# Altium PCB TestProject PCB V2.PcbDoc (part 1 of 2)
Units mil, origin at the board's own origin, x right, y up, seen from the top; angles counter-clockwise.
Board outline 2300 x 2780 mil, 2 copper layers (Top Layer, Bottom Layer), stack 61.811 mil thick; 69 components, 57 nets, 259 pads, 819 vias.
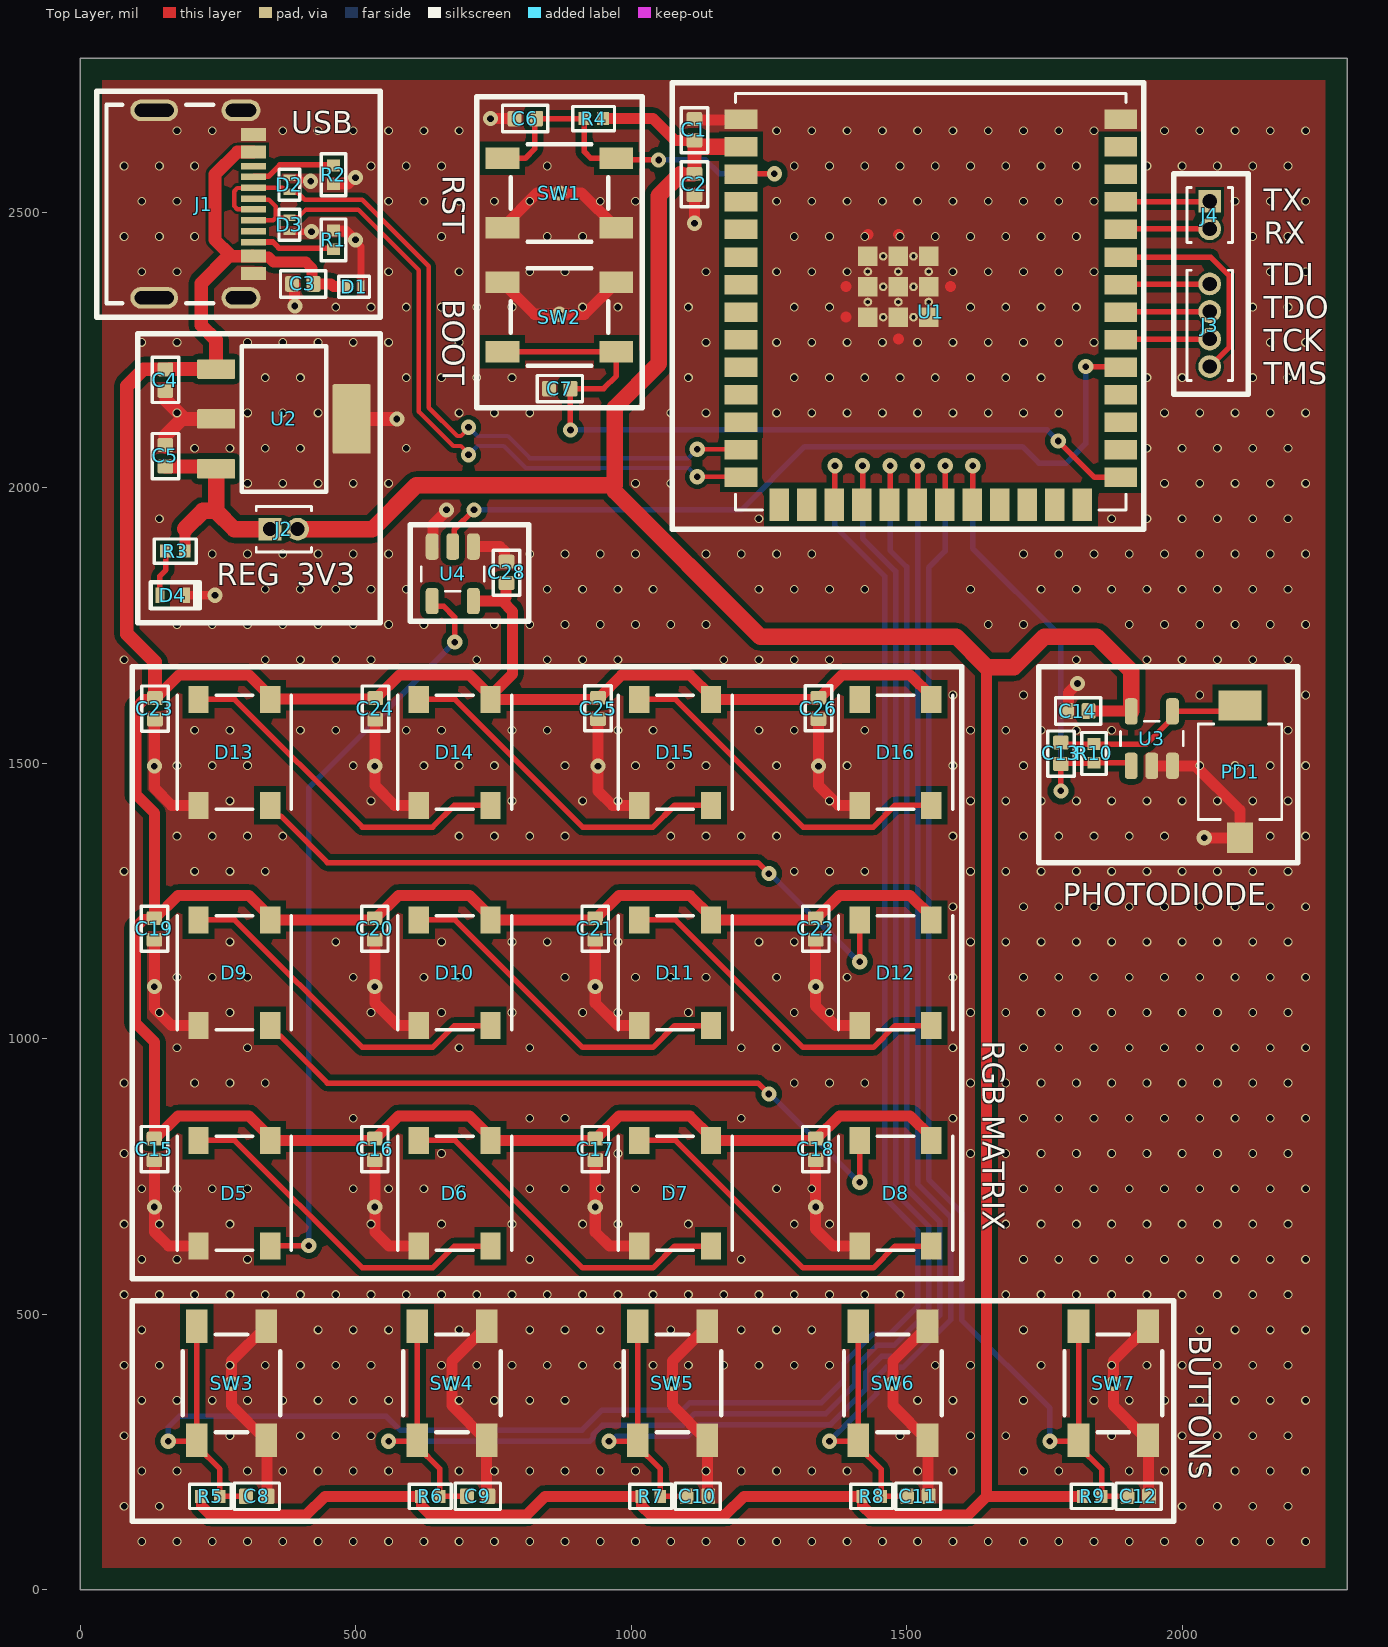
[diagram p0: Top Layer view]
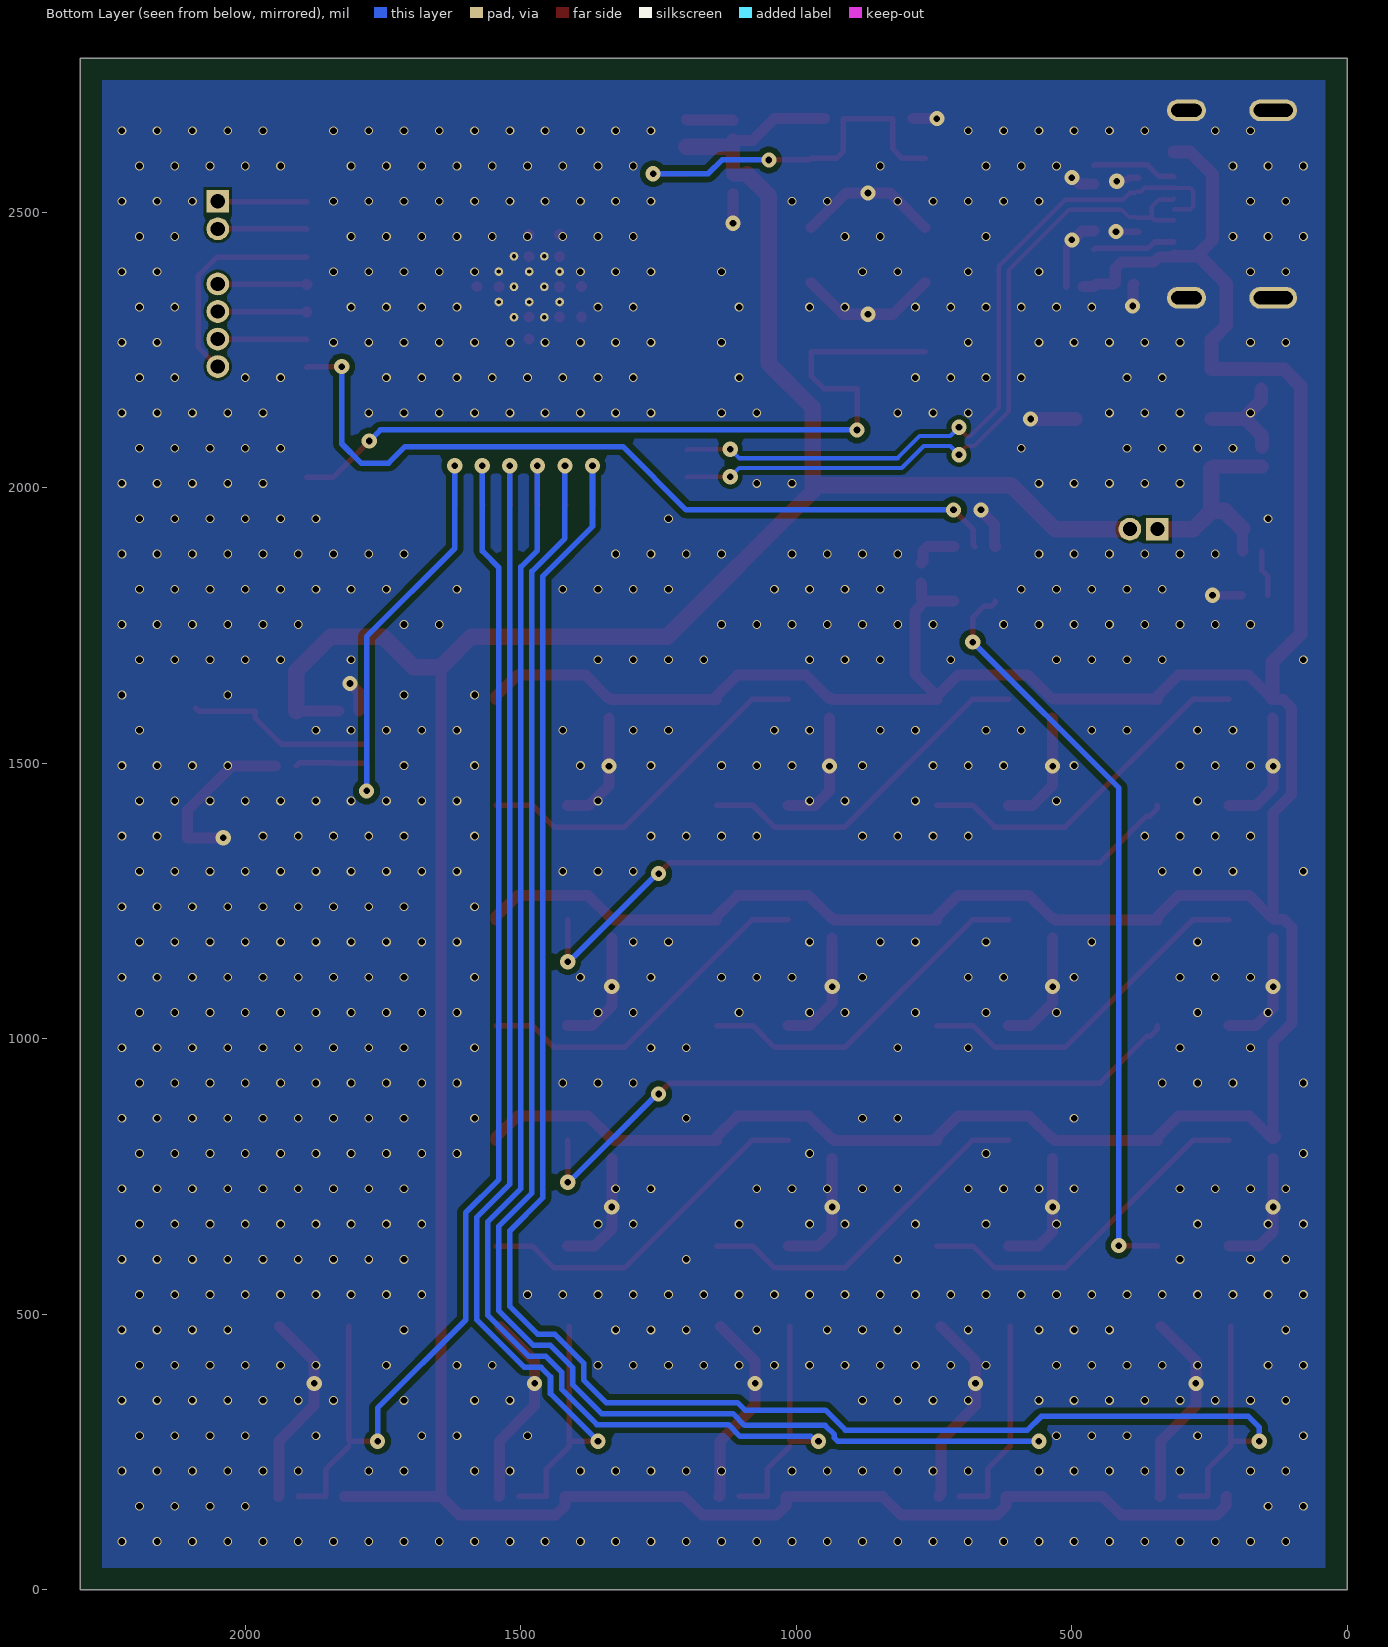
[diagram p1: Bottom Layer view, seen from below]

## Layer stack, top to bottom
Top Solder: solder mask 0.394, Solder Resist, Dk 3.5
Top Layer: signal copper 1.378
Dielectric 1: dielectric 59.055, FR-4, Dk 4.8
Bottom Layer: signal copper 1.378
Bottom Solder: solder mask 0.394, Solder Resist, Dk 3.5

## Board outline
0,0 0,2780 2300,2780 2300,0

## Design rules (kind name [scope] priority, off if disabled: settings)
Clearance SMALLER [WithinRoom('USB') or WithinRoom('REG_TO_3V3') or WithinRoom('UART')] p1: gap=5 ignorepadtopadclearanceinfootprint=FALSE
Clearance "DIFF90 Clearance" [InDifferentialPairClass('DIFF90')] p2: gap=8 ignorepadtopadclearanceinfootprint=FALSE
Clearance [All] p3: gap=10 ignorepadtopadclearanceinfootprint=FALSE
DiffPairsRouting DIFF90 [All] p1: maxlimit=10 minlimit=10 mostfreqgap=10 toplayer_minwidth=8 toplayer_maxwidth=8 toplayer_prefwidth=8 bottomlayer_minwidth=8 bottomlayer_maxwidth=8 bottomlayer_prefwidth=8 maxuncoupledlength=500
MinimumSolderMaskSliver [All] p1: minsoldermaskwidth=4
PolygonConnect [All] p1: connectstyle=Direct reliefconductorwidth=10 reliefentries=4 polygonreliefangle="90 Angle" airgapwidth=10
RoomDefinition REG_TO_3V3 [False vs False] p1: confinementstyle=ConfineIn formatcopy=TRUE lockcomponents=FALSE outline 320,1955 420,1955 420,1895 320,1895
RoomDefinition UART [False vs False] p2: confinementstyle=ConfineIn formatcopy=TRUE lockcomponents=FALSE outline 1980,2575 2125,2575 2125,2165 1980,2165
RoomDefinition USB [False vs False] p3: confinementstyle=ConfineIn formatcopy=TRUE lockcomponents=FALSE outline 365,2375 230,2375 230,2655 365,2655
RoutingVias [All] p1: holewidth=8 width=12 viastyle="Through Hole" minholewidth=8 minwidth=12 maxholewidth=8 maxwidth=12
SilkToSolderMaskClearance [IsPad] p1: minsilkscreentomaskgap=4 clearancetoexposedcopper=TRUE
SolderMaskExpansion [All] p1: expansion=4 istentingtop=FALSE
SupplyNets "Schematic Supply Nets_3" [InNet('+5V')] p1: voltage=0.000
SupplyNets "Schematic Supply Nets_2" [InNet('GND')] p2: voltage=0.000
SupplyNets "Schematic Supply Nets_1" [InNet('+3V3_REG')] p3: voltage=0.000
SupplyNets "Schematic Supply Nets" [InNet('+3V3')] p4: voltage=0.000
Width [All] p1: maxlimit=100 minlimit=10 preferedwidth=10 minimp=50.000000 maximp=50.000000 favimp=50.000000
27 further rules are at their usual default settings.

## Classes and differential pairs
differential pair class DIFF90: USB
differential pair USB: +USB_P -USB_N

## Components (designator, comment, footprint, x,y, rotation, side; value= is the part's Value field where it differs from the comment)
C1 "10uF, 10V" CAPC1005X70N 1115,2649 r270 top value=10uF
C2 "100nF, 50V" CAPC1005X70N 1115,2551 r90 top value=100nF
C3 "100nF, 50V" CAPC1005X70N 405,2370 r0 top value=100nF
C4 "4.7uF, 16V" CAPC1005X70N 155,2196 r90 top value=4.7uF
C5 "10uF, 10V" CAPC1005X70N 155,2057.68 r270 top value=10uF
C6 "1uF, 35V" CAPC1005X70N 807.68,2670 r180 top value=1uF
C7 "100nF, 50V" CAPC1005X70N 871,2180 r0 top value=100nF
C8 "1uF, 35V" CAPC1005X70N 321,170 r0 top value=1uF
C9 "1uF, 35V" CAPC1005X70N 721.98,170 r0 top value=1uF
C10 "1uF, 35V" CAPC1005X70N 1121,170 r0 top value=1uF
C11 "1uF, 35V" CAPC1005X70N 1521,170 r0 top value=1uF
C12 "1uF, 35V" CAPC1005X70N 1921,170 r0 top value=1uF
C13 "4.7nF, 50V" CAPC1005X70N 1780,1517.68 r270 top value=4.7nF
C14 "100nF, 50V" CAPC1005X70N 1811,1595 r0 top value=100nF
C15 "100nF, 50V" CAPC1005X70N 135,800 r90 top value=100nF
C16 "100nF, 50V" CAPC1005X70N 535,800 r90 top value=100nF
C17 "100nF, 50V" CAPC1005X70N 935,800 r90 top value=100nF
C18 "100nF, 50V" CAPC1005X70N 1335,800 r90 top value=100nF
C19 "100nF, 50V" CAPC1005X70N 135,1200 r90 top value=100nF
C20 "100nF, 50V" CAPC1005X70N 535,1200 r90 top value=100nF
C21 "100nF, 50V" CAPC1005X70N 935,1200 r90 top value=100nF
C22 "100nF, 50V" CAPC1005X70N 1335,1200 r90 top value=100nF
C23 "100nF, 50V" CAPC1005X70N 136,1599.5 r90 top value=100nF
C24 "100nF, 50V" CAPC1005X70N 536,1599.5 r90 top value=100nF
C25 "100nF, 50V" CAPC1005X70N 940,1600 r90 top value=100nF
C26 "100nF, 50V" CAPC1005X70N 1340,1600 r90 top value=100nF
C28 "100nF, 50V" CAPC1005X70N 774,1846 r270 top value=100nF
D1 "AQ3045-01ETG" RTVS_SOD882_LTF 497.5,2365 r180 top
D2 "AQ3045-01ETG" RTVS_SOD882_LTF 380,2550 r270 top
D3 "AQ3045-01ETG" RTVS_SOD882_LTF 380,2477.5 r90 top
D4 "VLMS1300-GS08" LED_VISHAY_VLMX1300_VIS 168.5,1805 r0 top
D5 "WS2812B" COM-16347_SPK 280,720 r270 top
D6 "WS2812B" COM-16347_SPK 680,720 r270 top
D7 "WS2812B" COM-16347_SPK 1080,720 r270 top
D8 "WS2812B" COM-16347_SPK 1480,720 r270 top
D9 "WS2812B" COM-16347_SPK 280,1120 r270 top
D10 "WS2812B" COM-16347_SPK 680,1120 r270 top
D11 "WS2812B" COM-16347_SPK 1080,1120 r270 top
D12 "WS2812B" COM-16347_SPK 1480,1120 r270 top
D13 "WS2812B" COM-16347_SPK 280,1520 r270 top
D14 "WS2812B" COM-16347_SPK 680,1520 r270 top
D15 "WS2812B" COM-16347_SPK 1080,1520 r270 top
D16 "WS2812B" COM-16347_SPK 1480,1520 r270 top
J1 "217179-0001" FP-2171790001-MFG 180,2515 r270 top
J2 "M50-3530242" HARWIN_M50-3530242 370,1925 r0 top
J3 "GRPB041VWVN-RC" GRPB041VWVN-RC 2050,2295 r270 top
J4 "M50-3530242" HARWIN_M50-3530242 2050,2495 r270 top
PD1 "BPW34S-Z" DIO_BPW_34_S-Z 2105,1485 r90 top
R1 "5k1" RESC1005X37N 460,2450 r270 top value=5.1kR
R2 "5k1" RESC1005X37N 460,2567.99 r90 top value=5.1kR
R3 "5k1" RESC1005X37N 172.99,1885 r0 top value=5.1kR
R4 "10k" RESC1005X37N 932.01,2670 r0 top value=10kR
R5 "10k" RESC1005X37N 236.67,170 r180 top value=10kR
R6 "10k" RESC1005X37N 635.69,170 r180 top value=10kR
R7 "10k" RESC1005X37N 1035.69,170 r180 top value=10kR
R8 "10k" RESC1005X37N 1436.67,170 r180 top value=10kR
R9 "10k" RESC1005X37N 1836.67,170 r180 top value=10kR
R10 "33k" RESC1005X37N 1840,1517.99 r270 top value=33kR
SW1 "PTS647SK38SMTR2LFS" FP-PTS647SK38SMTR2LFS-MFG 870,2535 r0 top
SW2 "PTS647SK38SMTR2LFS" FP-PTS647SK38SMTR2LFS-MFG 870,2310 r180 top
SW3 "PTS647SK38SMTR2LFS" FP-PTS647SK38SMTR2LFS-MFG 275,375 r90 top
SW4 "PTS647SK38SMTR2LFS" FP-PTS647SK38SMTR2LFS-MFG 675,375 r90 top
SW5 "PTS647SK38SMTR2LFS" FP-PTS647SK38SMTR2LFS-MFG 1075,375 r90 top
SW6 "PTS647SK38SMTR2LFS" FP-PTS647SK38SMTR2LFS-MFG 1475,375 r90 top
SW7 "PTS647SK38SMTR2LFS" FP-PTS647SK38SMTR2LFS-MFG 1875,375 r90 top
U1 "ESP32-S3-WROOM-1U-N8R8" XCVR_ESP32-S3-WROOM-1U 1543.94,2337.72 r0 top
U2 "TL1963A-33DCYR" DCY0004A_N 370,2125 r0 top
U3 "AD8515" SOT95P280X145-5N 1945,1545 r90 top
U4 "SN74LV1T125DBVR" SOT95P280X145-5N 676.4,1843.91 r270 top

## Footprints (in the part's own frame and the unit in brackets; to place one, negate y for a bottom-side part, rotate by r counter-clockwise, add the part's x,y. Pads: shape width x height; smd on the part's side, far side on the other; paste and mask are expansions set on the pad)
CAPC1005X70N [mm]
  rrect25% 0.64x0.72 smd: 1(-0.508,0) 2(0.483,0)
  silkscreen extent -1.04,-0.61 1.04,0.61, body extent -0.5,-0.25 0.5,0.25, height 0.55
COM-16347_SPK [mil]
  rect 49x37 smd paste+0 mask+0: 1(-96,64.96) 2(-96,-64.96) 3(96,-64.96) 4(96,64.96)
  silkscreen extent -104,-104 104,104, body extent -106,-99 106,99, height 63
DCY0004A_N [mm] "SOT223, 4-Leads, Body 6.7x3.7mm, Pitch 2.3mm, IPC Medium Density"
  rrect11% 1.75x0.9 smd: 1(-3.125,2.3) 2(-3.125,0) 3(-3.125,-2.3)
  rrect6% 1.75x3.2 smd: 4(3.125,0)
  silkscreen extent -1.95,-3.35 1.95,3.35, body extent -3.5,-3.25 3.5,3.25, height 1.62
DIO_BPW_34_S-Z [mm]
  rect 1.4x1.2 smd paste-0.05 mask+0.05: 1(-3.05,0)
  rect 1.4x2 smd paste-0.05 mask+0.05: 2(3.05,0)
  silkscreen extent -2.2,-1.92 2.2,1.92, body extent -3.22,-1.92 3.22,1.92, height 1.3
FP-2171790001-MFG [mm]
  rect 0.6x1.15 smd paste+0 mask+0: A1B12(-3.2,3.425) A4B9(-2.4,3.425) B1A12(3.2,3.425) B4A9(2.4,3.425)
  rect 0.3x1.15 smd paste+0 mask+0: A5(-1.25,3.425) A6(-0.25,3.425) A7(0.25,3.425) A8(1.25,3.425) B5(1.75,3.425) B6(0.75,3.425) B7(-0.75,3.425) B8(-1.75,3.425)
  rrect100% 1x1.8 hole 1.4 slot 0.6 at 0 deg paste-2539.97 mask+0: S1(-4.32,2.85) S2(4.32,2.85)
  rrect100% 1x2.2 hole 1.8 slot 0.6 at 0 deg paste-2539.97 mask+0: S3(-4.32,-1.15) S4(4.32,-1.15)
  silkscreen extent -4.57,-3.35 4.57,1.58, body extent -4.92,-3.45 4.92,4.1, height 0.25
FP-PTS647SK38SMTR2LFS-MFG [mm]
  rect 1.55x1 smd paste+0 mask+0: 1(-2.625,1.6) 2(2.625,1.6) 3(-2.625,-1.6) 4(2.625,-1.6)
  silkscreen extent -2.25,-2.25 2.25,2.25, body extent -3.5,-2.35 3.5,2.35, height 0.25
GRPB041VWVN-RC [mm]
  round 1.05 hole 0.65 mask+0.051: 1(-1.905,0) 2(-0.635,0) 3(0.635,0) 4(1.905,0)
  silkscreen extent -2.54,-1.05 2.54,1.05, body extent -2.54,-1.06 2.54,1.04, height 4
HARWIN_M50-3530242 [mm]
  rect 1.05x1.05 / inner round 1.05 / far side rect 1.05x1.05 hole 0.65 mask+0.051: 1(-0.635,0)
  round 1.05 hole 0.65 mask+0.051: 2(0.635,0)
  silkscreen extent -1.27,-1.05 1.27,1.05, body extent -1.32,-0.99 1.22,1.11, height 4
LED_VISHAY_VLMX1300_VIS [mil]
  rect 16x28 smd paste+0 mask+0: 1(-23.5,0) 2(23.5,0)
  silkscreen extent -40,-24 49,24, body extent -31,-16 31,16, height 32
RESC1005X37N [mm]
  rect 0.54x0.6 smd: 1(-0.432,0) 2(0.432,0)
  silkscreen extent -0.97,-0.56 0.97,0.56, body extent -0.5,-0.25 0.5,0.25, height 0.37
RTVS_SOD882_LTF [mil]
  rect 12x22 smd paste+0 mask+0: 1(-12.5,0) 2(12.5,0)
  silkscreen extent -28,-19 28,19, body extent -21,-13 21,13, height 22
SOT95P280X145-5N [mm]
  rrect50% 1.21x0.59 smd: 1(-1.255,0.95) 2(-1.255,0) 3(-1.255,-0.95) 4(1.255,-0.95) 5(1.255,0.95)
  silkscreen extent -0.33,-1.45 0.8,1.45, body extent -1.4,-1.45 1.4,1.45, height 1.45
XCVR_ESP32-S3-WROOM-1U [mm]
  rect 1.5x0.9 smd: 1(-8.75,8.41) 2(-8.75,7.14) 3(-8.75,5.87) 4(-8.75,4.6) 5(-8.75,3.33) 6(-8.75,2.06) 7(-8.75,0.79) 8(-8.75,-0.48) 9(-8.75,-1.75) 10(-8.75,-3.02) 11(-8.75,-4.29) 12(-8.75,-5.56) 13(-8.75,-6.83) 14(-8.75,-8.1) 27(8.75,-8.1) 28(8.75,-6.83) 29(8.75,-5.56) 30(8.75,-4.29) 31(8.75,-3.02) 32(8.75,-1.75) 33(8.75,-0.48) 34(8.75,0.79) 35(8.75,2.06) 36(8.75,3.33) 37(8.75,4.6) 38(8.75,5.87) 39(8.75,7.14) 40(8.75,8.41)
  rect 0.9x1.5 smd: 15(-6.985,-9.35) 16(-5.715,-9.35) 17(-4.445,-9.35) 18(-3.175,-9.35) 19(-1.905,-9.35) 20(-0.635,-9.35) 21(0.635,-9.35) 22(1.905,-9.35) 23(3.175,-9.35) 24(4.445,-9.35) 25(5.715,-9.35) 26(6.985,-9.35)
  rect 0.9x0.9 smd: 41(-2.9,2.09) 42(-1.5,2.09) 43(-0.1,2.09) 44(-2.9,0.69) 45(-1.5,0.69) 46(-0.1,0.69) 47(-2.9,-0.71) 48(-1.5,-0.71) 49(-0.1,-0.71)
  round 0.4 hole 0.2 mask+0: 41_10(-2.2,2.09) 41_11(-0.8,2.09) 41_12(-2.9,1.39) 41_13(-1.5,1.39) 41_14(-0.1,1.39) 41_15(-2.2,0.69) 41_16(-0.8,0.69) 41_17(-2.9,-0.01) 41_18(-1.5,-0.01) 41_19(-0.1,-0.01) 41_20(-2.2,-0.71) 41_21(-0.8,-0.71)
  silkscreen extent -9,-9.6 9,9.6, body extent -9,-9.6 9,9.6, height 3.35

## Part data
C1 C5: library part CL05A106MP5NRNC, "CAP CER 10UF 10V X5R 0402", Capacitor Type=Ceramic, Case/Package=0402, LCSC Part Number=C3035383, Manufacturer=Samsung, Max Operating Temperature=85°C, Min Operating Temperature=-55°C, Package Shape=Rectangular, Rated DC Voltage (URdc)=10V, Supplier Part Number=1276-CL05A106MP5NRNCCT-ND, Temperature Characteristics Code=X5R, Tolerance  (fill in as +-)=20%, Category="Ceramic Capacitors", ComponentLink1Description=https://datasheet.ciiva.com:443/pdfs/VipMasterIC/IC/SEMS/SEMS-S-A0008520814/SEMS-S-A0008520734-1.pdf?src-supplier=IHS+Markit, ComponentLink1URL=https://datasheet.ciiva.com:443/pdfs/VipMasterIC/IC/SEMS/SEMS-S-A0008520814/SEMS-S-A0008520734-1.pdf?src-supplier=IHS+Markit, Dielectric Material=Ceramic, JESD-609 Code=e3, Manufacturer Part Number=CL05A106MP5NRNC, Mounting Technology="Surface Mount", Multilayer=Yes, Packaging="Tape and Reel", Pins=2, Pricing="1=0,24, 10=0,141, 100=0,0894, 1000=0,06284, 2500=0,05624, 5000=0,05227 (USD)", Reach SVHC Compliant=Yes, RoHS=Yes, RoHS Compliant=Yes, Stock=49767, Supplier=Digikey, Terminal Finish=Nickel, Termination=Wraparound, Tolerance (fill in as +-)=20%
C2 C3 C7 C14 C15 C16 C17 C18 C19 C20 C21 C22 C23 C24 C25 C26 C28: library part CL05B104KB5NNNC, "CAP CER 0.1UF 50V X7R 0402", Capacitor Type=Ceramic, Case/Package=0402, LCSC Part Number=C960916, Manufacturer=Samsung, Max Operating Temperature=125°C, Min Operating Temperature=-55°C, Package Shape=Rectangular, Rated DC Voltage (URdc)=50V, Supplier Part Number=1276-CL05B104KB5NNNCCT-ND, Temperature Characteristics Code=X7R, Tolerance  (fill in as +-)=10%, Category="Ceramic Capacitors", ComponentLink1Description=https://datasheet.ciiva.com:443/pdfs/VipMasterIC/IC/SEMS/SEMS-S-A0008523115/SEMS-S-A0008523176-1.pdf?src-supplier=IHS+Markit, ComponentLink1URL=https://datasheet.ciiva.com:443/pdfs/VipMasterIC/IC/SEMS/SEMS-S-A0008523115/SEMS-S-A0008523176-1.pdf?src-supplier=IHS+Markit, ComponentLink2Description=https://datasheet.octopart.com/CL05B104KB5NNNC-Samsung-datasheet-97040617.pdf?src-supplier=Future+Electronics, ComponentLink2URL=https://datasheet.octopart.com/CL05B104KB5NNNC-Samsung-datasheet-97040617.pdf?src-supplier=Future+Electronics, ComponentLink3Description=https://datasheet.octopart.com/CL05B104KB5NNNC-Samsung-datasheet-8326407.pdf?src-supplier=TME, ComponentLink3URL=https://datasheet.octopart.com/CL05B104KB5NNNC-Samsung-datasheet-8326407.pdf?src-supplier=TME, Dielectric Material=Ceramic, JESD-609 Code=e3, Manufacturer Part Number=CL05B104KB5NNNC, Mounting Technology="Surface Mount", Multilayer=Yes, Packaging="Tape and Reel", Pins=2, Pricing="1=0,08, 10=0,018, 100=0,012, 1000=0,008, 2500=0,00768 (USD)", Reach SVHC Compliant=Yes, RoHS=Yes, RoHS Compliant=Yes, Stock=302298, Supplier=Digikey, Terminal Finish=Nickel, Termination=Wraparound, Tolerance (fill in as +-)=10%
C4: library part CL05A475MO5NUNC, "CAP CER 4.7UF 16V X5R 0402", Capacitor Type=Ceramic, Case/Package=0402, LCSC Part Number=C318563, Manufacturer=Samsung, Max Operating Temperature=85°C, Min Operating Temperature=-55°C, Package Shape=Rectangular, Package Style=SMTMeter, Rated DC Voltage (URdc)=16V, Supplier Part Number=1276-6836-1-ND, Temperature Characteristics Code=X5R, Tolerance  (fill in as +-)=20%, Category="Ceramic Capacitors", ComponentLink1Description=https://datasheet.ciiva.com:443/pdfs/VipMasterIC/IC/SEMS/SEMS-S-A0008384515/SEMS-S-A0008898881-1.pdf?src-supplier=IHS+Markit, ComponentLink1URL=https://datasheet.ciiva.com:443/pdfs/VipMasterIC/IC/SEMS/SEMS-S-A0008384515/SEMS-S-A0008898881-1.pdf?src-supplier=IHS+Markit, ComponentLink2Description=http://www.farnell.com/datasheets/2710653.pdf?src-supplier=Farnell, ComponentLink2URL=http://www.farnell.com/datasheets/2710653.pdf?src-supplier=Farnell, ComponentLink3Description=http://www.samsungsem.com/kr/support/product-search/mlcc/CL05A475MO5NUNC.jsp?src-supplier=Digikey, ComponentLink3URL=http://www.samsungsem.com/kr/support/product-search/mlcc/CL05A475MO5NUNC.jsp?src-supplier=Digikey, ComponentLink4Description=http://www.farnell.com/datasheets/2710653.pdf?src-supplier=Newark, ComponentLink4URL=http://www.farnell.com/datasheets/2710653.pdf?src-supplier=Newark, ComponentLink5Description=http://www.farnell.com/datasheets/2710653.pdf?src-supplier=Element14, ComponentLink5URL=http://www.farnell.com/datasheets/2710653.pdf?src-supplier=Element14, ComponentLink6Description=https://datasheet.octopart.com/CL05A475MO5NUNC-Samsung-Electro-Mechanics-datasheet-123102911.pdf?src-supplier=Future+Electronics, ComponentLink6URL=https://datasheet.octopart.com/CL05A475MO5NUNC-Samsung-Electro-Mechanics-datasheet-123102911.pdf?src-supplier=Future+Electronics, Dielectric Material=Ceramic, Height=0.7mm, JESD-609 Code=e3, Length=1mm, Manufacturer Part Number=CL05A475MO5NUNC, Mounting Technology="Surface Mount", Multilayer=Yes, Packaging="Tape and Reel", Pins=2, Pricing="1=0,15, 10=0,091, 100=0,0851 (USD)", Reach SVHC Compliant=Yes, RoHS=Yes, RoHS Compliant=Yes, Stock=3323, Supplier=Digikey, Terminal Finish=Nickel, Termination=Wraparound, Tolerance (fill in as +-)=20%, Width=0.5mm
C6 C8 C9 C10 C11 C12: library part CL05A105KL5NRNC, "CAP CER 1UF 35V X5R 0402", Capacitor Type=Ceramic, Case/Package=0402, LCSC Part Number=C307413, Manufacturer=Samsung, Max Operating Temperature=85°C, Min Operating Temperature=-55°C, Package Shape=Rectangular, Rated DC Voltage (URdc)=35V, Supplier Part Number=1276-6796-1-ND, Temperature Characteristics Code=X5R, Tolerance  (fill in as +-)=10%, Category="Ceramic Capacitors", ComponentLink1Description=https://datasheet.ciiva.com:443/pdfs/VipMasterIC/IC/SEMS/SEMS-S-A0008384515/SEMS-S-A0008872905-1.pdf?src-supplier=IHS+Markit, ComponentLink1URL=https://datasheet.ciiva.com:443/pdfs/VipMasterIC/IC/SEMS/SEMS-S-A0008384515/SEMS-S-A0008872905-1.pdf?src-supplier=IHS+Markit, ComponentLink2Description=http://www.samsungsem.com/kr/support/product-search/mlcc/CL05A105KL5NRNC.jsp?src-supplier=Digikey, ComponentLink2URL=http://www.samsungsem.com/kr/support/product-search/mlcc/CL05A105KL5NRNC.jsp?src-supplier=Digikey, ComponentLink3Description=https://datasheet.octopart.com/CL05A105KL5NRNC-Samsung-datasheet-8326407.pdf?src-supplier=TME, ComponentLink3URL=https://datasheet.octopart.com/CL05A105KL5NRNC-Samsung-datasheet-8326407.pdf?src-supplier=TME, Dielectric Material=Ceramic, JESD-609 Code=e3, Manufacturer Part Number=CL05A105KL5NRNC, Mounting Technology="Surface Mount", Multilayer=Yes, Packaging="Tape and Reel", Pins=2, Pricing="1=0,29, 10=0,17, 100=0,1097, 1000=0,07829, 2500=0,07048, 5000=0,06578 (USD)", Reach SVHC Compliant=Yes, RoHS=Yes, RoHS Compliant=Yes, Stock=72807, Supplier=Digikey, Terminal Finish=Nickel, Termination=Wraparound, Tolerance (fill in as +-)=10%
C13: library part CL05B472KB5VPNC, "CAP CER 4700PF 50V X7R 0402", Capacitor Type=Ceramic, Case/Package=0402, LCSC Part Number=C307338, Manufacturer=Samsung, Max Operating Temperature=125°C, Min Operating Temperature=-55°C, Package Shape=Rectangular, Rated DC Voltage (URdc)=50V, Supplier Part Number=1276-6576-1-ND, Temperature Characteristics Code=X7R, Tolerance  (fill in as +-)=10%, Category="Ceramic Capacitors", ComponentLink1Description=https://datasheet.ciiva.com:443/pdfs/VipMasterIC/IC/SEMS/SEMS-S-A0007757376/SEMS-S-A0007757405-1.pdf?src-supplier=IHS+Markit, ComponentLink1URL=https://datasheet.ciiva.com:443/pdfs/VipMasterIC/IC/SEMS/SEMS-S-A0007757376/SEMS-S-A0007757405-1.pdf?src-supplier=IHS+Markit, ComponentLink2Description=http://www.samsungsem.com/kr/support/product-search/mlcc/CL05B472KB5VPNC.jsp?src-supplier=Digikey, ComponentLink2URL=http://www.samsungsem.com/kr/support/product-search/mlcc/CL05B472KB5VPNC.jsp?src-supplier=Digikey, ComponentLink3Description=http://www.samsungsem.com/kr/support/library/product-catalog/mlcc.jsp?src-supplier=Digikey, ComponentLink3URL=http://www.samsungsem.com/kr/support/library/product-catalog/mlcc.jsp?src-supplier=Digikey, ComponentLink4Description=http://www.samsungsem.com/servlet/FileDownload?type=spec&file=CL05B472KB5VPNC.pdf&src-supplier=Avnet, ComponentLink4URL=http://www.samsungsem.com/servlet/FileDownload?type=spec&file=CL05B472KB5VPNC.pdf&src-supplier=Avnet, ComponentLink5Description=https://datasheet.octopart.com/CL05B472KB5VPNC-Samsung-Electro-Mechanics-datasheet-133510618.pdf?src-supplier=Future+Electronics, ComponentLink5URL=https://datasheet.octopart.com/CL05B472KB5VPNC-Samsung-Electro-Mechanics-datasheet-133510618.pdf?src-supplier=Future+Electronics, Dielectric Material=Ceramic, JESD-609 Code=e3, Manufacturer Part Number=CL05B472KB5VPNC, Mounting Technology="Surface Mount", Multilayer=Yes, Packaging="Tape and Reel", Pins=2, Pricing="1=0,1, 10=0,031, 100=0,0179, 1000=0,01116, 2500=0,0095, 5000=0,00851 (USD)", Reach SVHC Compliant=Yes, Reference Standard=AEC-Q200, RoHS=Yes, RoHS Compliant=Yes, Stock=112941, Supplier=Digikey, Terminal Finish=Nickel, Termination=Wraparound, Tolerance (fill in as +-)=10%
D1 D2 D3: "TVS DIODE 5.3VWM 12VC SOD882", LCSC Part Number=C3710326, Manufacturer=Littelfuse, Max Breakdown Voltage=9V, Max Operating Temperature=150°C, Min Breakdown Voltage=6.8V, Min Operating Temperature=-55°C, Non-rep Peak Rev Power Dis-Max=40W, Package Body Material=Plastic, Package Shape=Rectangular, Package Style="CHIP CARRIERMeter", Rep Pk Reverse Voltage-Max=5.3V, Supplier Part Number=F9321CT-ND, Category="TVS Diodes", ComponentLink1Description=https://datasheet.ciiva.com:443/pdfs/VipMasterIC/IC/LFSI/LFSI-S-A0007892042/LFSI-S-A0007892042-1.pdf?src-supplier=IHS+Markit, ComponentLink1URL=https://datasheet.ciiva.com:443/pdfs/VipMasterIC/IC/LFSI/LFSI-S-A0007892042/LFSI-S-A0007892042-1.pdf?src-supplier=IHS+Markit, ComponentLink2Description=https://www.littelfuse.com/~/media/electronics/datasheets/tvs_diode_arrays/littelfuse_tvs_diode_array_aq3045_datasheet.pdf.pdf?src-supplier=Digikey, ComponentLink2URL=https://www.littelfuse.com/~/media/electronics/datasheets/tvs_diode_arrays/littelfuse_tvs_diode_array_aq3045_datasheet.pdf.pdf?src-supplier=Digikey, ComponentLink3Description=http://www.littelfuse.com/~/media/electronics/datasheets/tvs_diode_arrays/littelfuse_tvs_diode_array_aq3045_datasheet.pdf.pdf?src-supplier=Digikey, ComponentLink3URL=http://www.littelfuse.com/~/media/electronics/datasheets/tvs_diode_arrays/littelfuse_tvs_diode_array_aq3045_datasheet.pdf.pdf?src-supplier=Digikey, Diode Element Material=SILICON, Diode Type="TRANS VOLTAGE SUPPRESSOR", Manufacturer Part Number=AQ3045-01ETG, Number of Elements=1, Pins=2, Polarity=Bidirectional, Pricing="1=0,45, 10=0,29, 100=0,141, 500=0,134, 1000=0,131 (USD)", Reach SVHC Compliant=Yes, Reference Standard=AEC-Q101, RoHS=Yes, RoHS Compliant=Yes, Stock=7460, Supplier=Digikey, Surface Mount=Yes, Technology=AVALANCHE, Terminal Form="No Lead", Terminal Position=BOTTOM
D4: "LED RED 0603 SMD", Color=Red, Forward Current=30mA, Forward Voltage=2.4V, LCSC Part Number=C83242, Manufacturer="Vishay Semiconductors", Max Operating Temperature=85°C, Min Operating Temperature=-35°C, Reverse Voltage-Max=5V, Supplier Part Number=VLMS1300-GS08CT-ND, Additional Feature="HIGH RELIABILITY", Category=LEDs, Channels=1, Color@wavelength=Red, ComponentLink1Description=https://datasheet.ciiva.com:443/pdfs/VipMasterIC/IC/VISH/VISH-S-A0004564149/VISH-S-A0004564149-1.pdf?src-supplier=IHS+Markit, ComponentLink1URL=https://datasheet.ciiva.com:443/pdfs/VipMasterIC/IC/VISH/VISH-S-A0004564149/VISH-S-A0004564149-1.pdf?src-supplier=IHS+Markit, ComponentLink2Description=https://datasheet.ciiva.com/2114/vlmo1300-2114931.pdf?src-supplier=Digikey, ComponentLink2URL=https://datasheet.ciiva.com/2114/vlmo1300-2114931.pdf?src-supplier=Digikey, ComponentLink3Description=https://datasheet.ciiva.com/26322/vlmo1300-26322153.pdf?src-supplier=Element14, ComponentLink3URL=https://datasheet.ciiva.com/26322/vlmo1300-26322153.pdf?src-supplier=Element14, ComponentLink4Description=https://datasheet.ciiva.com/8028/vlmo1300-8028047.pdf?src-supplier=Element14, ComponentLink4URL=https://datasheet.ciiva.com/8028/vlmo1300-8028047.pdf?src-supplier=Element14, Luminous Intensity-Nom=54mcd, Manufacturer Part Number=VLMS1300-GS08, Mounting Technology="Surface Mount", Optoelectronic Device Type="SINGLE COLOR LED", Overall Height=0.8mm, Packaging="Tape and Reel", Pins=2, Pricing="1=0,21, 10=0,143, 100=0,0998, 500=0,07982, 1000=0,07322 (USD)", Reach SVHC Compliant=Yes, RoHS=Yes, RoHS Compliant=Yes, Shape=Rectangular, Size=1.1mm, Stock=56745, Supplier=Digikey, Terminal Pitch=1.5mm, Viewing Angle=130°
D5 D6 D7 D8 D9 D10 D11 D12 D13 D14 D15 D16: library part 16347, "ADDRESS LED RED/GRN/BLUE", LCSC Part Number=C7433145, Manufacturer=SparkFun, Supplier Part Number=1568-16347CT-ND, Manufacturer Part Number=16347, Pricing="1=0,68 (USD)", RoHS=No, Stock=44982, Supplier=Digikey
J1: "CONN RCP USB2.0 TYP C 24P SMD RA", LCSC Part Number=C3197684, Manufacturer=Molex, Supplier Part Number=900-2171790001CT-ND, Category=Connectors, Manufacturer Part Number=217179-0001, Pricing="1=0,83, 10=0,704, 25=0,6596, 50=0,628, 100=0,598, 250=0,56052, 500=0,53374 (USD)", RoHS=No, Stock=20923, Supplier=Digikey
J2 J4: "CONN HEADER VERT 2POS 1.27MM", Flammability Rating="UL94 V-0", LCSC Part Number=C3325334, Manufacturer=Harwin, Supplier Part Number=952-3598-ND, Category="Headers and Wire Housings", ComponentLink1Description=https://datasheet.ciiva.com:443/pdfs/VipMasterIC/IC/HRWN/HRWN-S-A0002541787/HRWN-S-A0002541787-1.pdf?src-supplier=IHS+Markit, ComponentLink1URL=https://datasheet.ciiva.com:443/pdfs/VipMasterIC/IC/HRWN/HRWN-S-A0002541787/HRWN-S-A0002541787-1.pdf?src-supplier=IHS+Markit, ComponentLink2Description=https://cdn.harwin.com/pdfs/Harwin_PC_Connectors_Archer.pdf?src-supplier=Digikey, ComponentLink2URL=https://cdn.harwin.com/pdfs/Harwin_PC_Connectors_Archer.pdf?src-supplier=Digikey, Connector Type="BOARD CONNECTOR", Contact Finish - Mating="NOT SPECIFIED", Contact Gender=Male, DIN Conformance=No, Filter Feature=No, IEC Conformance=No, Manufacturer Part Number=M50-3530242, MIL Conformance=No, Mixed Contacts=No, Mounting Style=STRAIGHT, Mounting Technology=Board, Number of Contacts=2, Number of Rows Loaded=1, Option="General Purpose", Pricing="1=0,1, 10=0,084, 100=0,0713, 500=0,06358, 1000=0,06054, 5000=0,05403, 10000=0,05145 (USD)", Reach SVHC Compliant=Yes, RoHS=Yes, RoHS Compliant=Yes, Stock=31275, Supplier=Digikey, Terminal Pitch=1.27mm, Termination=Solder
J3: "CONN HEADER VERT 4POS 1.27MM", Flammability Rating="UL94 V-0", LCSC Part Number=C7198233, Manufacturer=Sullins, Manufacturer Series=GRPB, Supplier Part Number=S9014E-04-ND, Category=Connectors, ComponentLink1Description=https://datasheet.ciiva.com:443/pdfs/VipMasterIC/IC/SUCS/SUCSS00161/SUCSS00161-1.pdf?src-supplier=IHS+Markit, ComponentLink1URL=https://datasheet.ciiva.com:443/pdfs/VipMasterIC/IC/SUCS/SUCSS00161/SUCSS00161-1.pdf?src-supplier=IHS+Markit, ComponentLink2Description=https://datasheet.ciiva.com/726/71-grpb-1vwvn-rc-10957-c-726650.pdf?src-supplier=Digikey, ComponentLink2URL=https://datasheet.ciiva.com/726/71-grpb-1vwvn-rc-10957-c-726650.pdf?src-supplier=Digikey, Connector Type="BOARD CONNECTOR", Contact Finish - Mating="GOLD FLASH", Contact Finish - Termination="GOLD FLASH", Contact Gender=Male, Contact Material=Brass, DIN Conformance=No, Filter Feature=No, IEC Conformance=No, JESD-609 Code=e4, Manufacturer Part Number=GRPB041VWVN-RC, MIL Conformance=No, Mixed Contacts=No, Mounting Style=STRAIGHT, Mounting Technology=Board, Number of Contacts=4, Number of Rows Loaded=1, Option="General Purpose", Pricing="1=0,25, 10=0,212, 100=0,1804, 500=0,16098, 1000=0,15328, 5000=0,13682, 10000=0,13029 (USD)", Reach SVHC Compliant=Yes, RoHS=Yes, RoHS Compliant=Yes, Stock=10602, Supplier=Digikey, Terminal Pitch=1.27mm, Termination=Solder
PD1: "SENSOR PHOTODIODE 850NM 2SMD GW", Dark Current-Max=30nA, LCSC Part Number=C67891, Light Current-Nom=50uA, Manufacturer="Osram Opto", Max Operating Temperature=100°C, Min Operating Temperature=-40°C, Reverse Breakdown Voltage-Min=32V, Supplier Part Number=475-BPW34S-ZCT-ND, Category=Phototransistor, Channels=1, ComponentLink1Description=https://datasheet.ciiva.com:443/pdfs/VipMasterIC/IC/OSOS/OSOS-S-A0005288917/OSOS-S-A0005288917-1.pdf?src-supplier=IHS+Markit, ComponentLink1URL=https://datasheet.ciiva.com:443/pdfs/VipMasterIC/IC/OSOS/OSOS-S-A0005288917/OSOS-S-A0005288917-1.pdf?src-supplier=IHS+Markit, ComponentLink2Description=https://datasheet.ciiva.com/2819/bpw34-spdf-2819825.pdf?src-supplier=Digikey, ComponentLink2URL=https://datasheet.ciiva.com/2819/bpw34-spdf-2819825.pdf?src-supplier=Digikey, ComponentLink3Description=https://datasheet.ciiva.com/2819/bpw34-spdf-2819826.pdf?src-supplier=Digikey, ComponentLink3URL=https://datasheet.ciiva.com/2819/bpw34-spdf-2819826.pdf?src-supplier=Digikey, ComponentLink4Description=https://datasheet.ciiva.com/2819/bpw34-spdf-2819827.pdf?src-supplier=Digikey, ComponentLink4URL=https://datasheet.ciiva.com/2819/bpw34-spdf-2819827.pdf?src-supplier=Digikey, Infrared Range=Yes, JESD-609 Code=e3, Manufacturer Part Number=BPW34S-Z, Optoelectronic Device Type="PIN PHOTODIODE", Pricing="1=1,17, 10=0,824, 100=0,6131, 500=0,51934 (USD)", Reach SVHC Compliant=Yes, RoHS=Yes, RoHS Compliant=Yes, Shape=Square, Size=2.65mm, Stock=32968, Supplier=Digikey, Terminal Finish=Tin
R1 R2 R3: library part AC0402FR-075K1L, "RES SMD 5.1K OHM 1% 1/16W 0402", Case Code (Imperial)=0402, Case Code (Metric)=1005, LCSC Part Number=C144745, Manufacturer=Yageo, Max Operating Temperature=155°C, Max Power Dissipation=63mW, Min Operating Temperature=-55°C, Supplier Part Number=YAG3503CT-ND, Temperature Coefficient=100ppm/°C, Tolerance=1%, Voltage Rating=50V, Case/Package=0402, Category="Chip SMD Resistors", ComponentLink1Description=https://datasheet.octopart.com/AC0402FR-075K1L-Yageo-datasheet-166720450.pdf?src-supplier=Future+Electronics, ComponentLink1URL=https://datasheet.octopart.com/AC0402FR-075K1L-Yageo-datasheet-166720450.pdf?src-supplier=Future+Electronics, ComponentLink2Description=http://www.yageo.com/NewPortal/yageodocoutput?fileName=/pdf/R-Chip/PYu-AC_51_RoHS_L_6.pdf&src-supplier=Digikey, ComponentLink2URL=http://www.yageo.com/NewPortal/yageodocoutput?fileName=/pdf/R-Chip/PYu-AC_51_RoHS_L_6.pdf&src-supplier=Digikey, ComponentLink3Description=http://www.yageo.com/documents/recent/PYu-AC_51_RoHS_L_2_revised.pdf?src-supplier=Future+Electronics, ComponentLink3URL=http://www.yageo.com/documents/recent/PYu-AC_51_RoHS_L_2_revised.pdf?src-supplier=Future+Electronics, ComponentLink4Description=https://datasheet.octopart.com/AC0402FR-075K1L-Yageo-datasheet-178509465.pdf?src-supplier=Newark, ComponentLink4URL=https://datasheet.octopart.com/AC0402FR-075K1L-Yageo-datasheet-178509465.pdf?src-supplier=Newark, ComponentLink5Description=https://datasheet.octopart.com/AC0402FR-075K1L-Yageo-datasheet-178509465.pdf?src-supplier=Farnell, ComponentLink5URL=https://datasheet.octopart.com/AC0402FR-075K1L-Yageo-datasheet-178509465.pdf?src-supplier=Farnell, ComponentLink6Description=https://datasheet.octopart.com/AC0402FR-075K1L-Yageo-datasheet-178509465.pdf?src-supplier=Element14, ComponentLink6URL=https://datasheet.octopart.com/AC0402FR-075K1L-Yageo-datasheet-178509465.pdf?src-supplier=Element14, Features="Moisture Resistant,Automotive AEC-Q200", Height=0.015inch, Lead Free=5697LeadFree, Length=0.039inch, Manufacturer Part Number=AC0402FR-075K1L, Mounting Technology="Surface Mount", Number of Terminations=2, Packaging="Cut Tape", Power Rating=63mW, Pricing="1=0,1, 10=0,009, 100=0,0071, 1000=0,00612, 2500=0,0051, 5000=0,00407 (USD)", RoHS=Yes, RoHS Compliant=Yes, Series=AC, Stock=60988, Supplier=Digikey, Width=0.02inch
R4 R5 R6 R7 R8 R9: library part AC0402FR-0710KL, "RES SMD 10K OHM 1% 1/16W 0402", Case/Package=0402, LCSC Part Number=C144807, Manufacturer=Yageo, Max Operating Temperature=155°C, Min Operating Temperature=-55°C, Package Height=0.32mm, Package Length=1mm, Package Shape=Rectangular, Package Width=0.5mm, Power=62.5mW, Rated Temperature=70°C, Resistor Type="FIXED RESISTOR", Supplier Part Number=YAG3436CT-ND, Temperature Coefficient (ppm/Cel)=100, Tolerance=1%, Working Voltage=50V, Additional Feature="LASER TRIMMABLE", Category="Chip SMD Resistors", ComponentLink1Description=https://datasheet.ciiva.com:443/pdfs/VipMasterIC/IC/YAGO/YAGO-S-A0003597364/YAGO-S-A0003597364-1.pdf?src-supplier=IHS+Markit, ComponentLink1URL=https://datasheet.ciiva.com:443/pdfs/VipMasterIC/IC/YAGO/YAGO-S-A0003597364/YAGO-S-A0003597364-1.pdf?src-supplier=IHS+Markit, ComponentLink2Description=https://datasheet.ciiva.com/12656/pyu-ac-51-rohs-l-2-12656634.pdf?src-supplier=Mouser, ComponentLink2URL=https://datasheet.ciiva.com/12656/pyu-ac-51-rohs-l-2-12656634.pdf?src-supplier=Mouser, Construction=Chip, JESD-609 Code=e3, Manufacturer Part Number=AC0402FR-0710KL, Mounting Technology="Surface Mount", Packaging="Tape and Reel", Pins=2, Pricing="1=0,1, 10=0,009, 100=0,0082, 1000=0,00612, 2500=0,0051, 5000=0,00407 (USD)", Reach SVHC Compliant=Yes, Reference Standard=AEC-Q200, RoHS=Yes, RoHS Compliant=Yes, Stock=624823, Supplier=Digikey, Technology="METAL GLAZE/THICK FILM", Terminal Finish=Nickel, Termination=Wraparound
R10: library part AC0402FR-0733KL, "RES SMD 33K OHM 1% 1/16W 0402", Case/Package=0402, LCSC Part Number=C138291, Manufacturer=Yageo, Max Operating Temperature=155°C, Min Operating Temperature=-55°C, Package Height=0.32mm, Package Length=1mm, Package Shape=Rectangular, Package Width=0.5mm, Power=62.5mW, Rated Temperature=70°C, Resistor Type="FIXED RESISTOR", Supplier Part Number=YAG3477CT-ND, Temperature Coefficient (ppm/Cel)=100, Tolerance=1%, Working Voltage=50V, Additional Feature="LASER TRIMMABLE", Category="Chip SMD Resistors", ComponentLink1Description=https://datasheet.ciiva.com:443/pdfs/VipMasterIC/IC/YAGO/YAGO-S-A0003597364/YAGO-S-A0003597364-1.pdf?src-supplier=IHS+Markit, ComponentLink1URL=https://datasheet.ciiva.com:443/pdfs/VipMasterIC/IC/YAGO/YAGO-S-A0003597364/YAGO-S-A0003597364-1.pdf?src-supplier=IHS+Markit, ComponentLink2Description=https://datasheet.octopart.com/AC0402FR-0733KL-Yageo-datasheet-178509465.pdf?src-supplier=Farnell, ComponentLink2URL=https://datasheet.octopart.com/AC0402FR-0733KL-Yageo-datasheet-178509465.pdf?src-supplier=Farnell, ComponentLink3Description=http://www.yageo.com/NewPortal/yageodocoutput?fileName=/pdf/R-Chip/PYu-AC_51_RoHS_L_6.pdf&src-supplier=Digikey, ComponentLink3URL=http://www.yageo.com/NewPortal/yageodocoutput?fileName=/pdf/R-Chip/PYu-AC_51_RoHS_L_6.pdf&src-supplier=Digikey, ComponentLink4Description=https://www.yageo.com/upload/media/product/productsearch/datasheet/rchip/PYu-AC_51_RoHS_L_7.pdf?src-supplier=Digikey, ComponentLink4URL=https://www.yageo.com/upload/media/product/productsearch/datasheet/rchip/PYu-AC_51_RoHS_L_7.pdf?src-supplier=Digikey, ComponentLink5Description=https://datasheet.octopart.com/AC0402FR-0733KL-Yageo-datasheet-178509465.pdf?src-supplier=Element14, ComponentLink5URL=https://datasheet.octopart.com/AC0402FR-0733KL-Yageo-datasheet-178509465.pdf?src-supplier=Element14, ComponentLink6Description=https://datasheet.octopart.com/AC0402FR-0733KL-Yageo-datasheet-178509465.pdf?src-supplier=Newark, ComponentLink6URL=https://datasheet.octopart.com/AC0402FR-0733KL-Yageo-datasheet-178509465.pdf?src-supplier=Newark, ComponentLink7Description=https://datasheet.octopart.com/AC0402FR-0733KL-Yageo-datasheet-166720450.pdf?src-supplier=Future+Electronics, ComponentLink7URL=https://datasheet.octopart.com/AC0402FR-0733KL-Yageo-datasheet-166720450.pdf?src-supplier=Future+Electronics, ComponentLink8Description=http://www.yageo.com/documents/recent/PYu-AC_51_RoHS_L_2_revised.pdf?src-supplier=Future+Electronics, ComponentLink8URL=http://www.yageo.com/documents/recent/PYu-AC_51_RoHS_L_2_revised.pdf?src-supplier=Future+Electronics, ComponentLink9Description=https://datasheet.octopart.com/AC0402FR-0733KL-Yageo-datasheet-140571090.pdf?src-supplier=Arrow.cn, ComponentLink9URL=https://datasheet.octopart.com/AC0402FR-0733KL-Yageo-datasheet-140571090.pdf?src-supplier=Arrow.cn, Construction=Chip, JESD-609 Code=e3, Manufacturer Part Number=AC0402FR-0733KL, Mounting Technology="Surface Mount", Packaging="Tape and Reel", Pins=2, Pricing="1=0,1, 10=0,011, 100=0,0082, 1000=0,00612, 2500=0,0051, 5000=0,00407 (USD)", Reach SVHC Compliant=Yes, Reference Standard=AEC-Q200, RoHS=Yes, RoHS Compliant=Yes, Stock=108993, Supplier=Digikey, Technology="METAL GLAZE/THICK FILM", Terminal Finish=Nickel, Termination=Wraparound
SW1 SW2 SW3 SW4 SW5 SW6 SW7: "SWITCH TACTILE SPST-NO 0.05A 12V", LCSC Part Number=C2798978, Manufacturer="ITT C&K", Supplier Part Number=PTS647SK38SMTR2LFSCT-ND, Category="Tactile Switches", ComponentLink1Description=http://datasheet.octopart.com/PTS647SK38SMTR2LFS-C%26K-Components-datasheet-117317067.pdf?src-supplier=Digikey, ComponentLink1URL=http://datasheet.octopart.com/PTS647SK38SMTR2LFS-C%26K-Components-datasheet-117317067.pdf?src-supplier=Digikey, ComponentLink2Description=https://www.ckswitches.com/media/2567/pts647.pdf?src-supplier=Digikey, ComponentLink2URL=https://www.ckswitches.com/media/2567/pts647.pdf?src-supplier=Digikey, ComponentLink3Description=http://datasheet.octopart.com/PTS647SK38SMTR2LFS-C%26K-Components-datasheet-117317067.pdf?src-supplier=Avnet, ComponentLink3URL=http://datasheet.octopart.com/PTS647SK38SMTR2LFS-C%26K-Components-datasheet-117317067.pdf?src-supplier=Avnet, ComponentLink4Description=http://datasheet.octopart.com/PTS647SK38SMTR2LFS-C%26K-Components-datasheet-117317067.pdf?src-supplier=Arrow+Electronics, ComponentLink4URL=http://datasheet.octopart.com/PTS647SK38SMTR2LFS-C%26K-Components-datasheet-117317067.pdf?src-supplier=Arrow+Electronics, ComponentLink5Description=http://datasheet.octopart.com/PTS647SK38SMTR2LFS-C%26K-Components-datasheet-117317067.pdf?src-supplier=Verical, ComponentLink5URL=http://datasheet.octopart.com/PTS647SK38SMTR2LFS-C%26K-Components-datasheet-117317067.pdf?src-supplier=Verical, ComponentLink6Description=http://datasheet.octopart.com/PTS647SK38SMTR2LFS-C%26K-Components-datasheet-117317067.pdf?src-supplier=Newark, ComponentLink6URL=http://datasheet.octopart.com/PTS647SK38SMTR2LFS-C%26K-Components-datasheet-117317067.pdf?src-supplier=Newark, ComponentLink7Description=http://datasheet.octopart.com/PTS647SK38SMTR2LFS-C%26K-Components-datasheet-117317067.pdf?src-supplier=Mouser, ComponentLink7URL=http://datasheet.octopart.com/PTS647SK38SMTR2LFS-C%26K-Components-datasheet-117317067.pdf?src-supplier=Mouser, ComponentLink8Description=http://datasheet.octopart.com/PTS647SK38SMTR2LFS-C%26K-Components-datasheet-117317067.pdf?src-supplier=Onlinecomponents.com, ComponentLink8URL=http://datasheet.octopart.com/PTS647SK38SMTR2LFS-C%26K-Components-datasheet-117317067.pdf?src-supplier=Onlinecomponents.com, ComponentLink9Description=http://datasheet.octopart.com/PTS647SK38SMTR2LFS-C%26K-Components-datasheet-117317067.pdf?src-supplier=Allied+Electronics, ComponentLink9URL=http://datasheet.octopart.com/PTS647SK38SMTR2LFS-C%26K-Components-datasheet-117317067.pdf?src-supplier=Allied+Electronics, ComponentLink10Description=https://datasheet.octopart.com/PTS647SK38SMTR2LFS-C%26K-Components-datasheet-156105943.pdf?src-supplier=TME, ComponentLink10URL=https://datasheet.octopart.com/PTS647SK38SMTR2LFS-C%26K-Components-datasheet-156105943.pdf?src-supplier=TME, ComponentLink11Description=http://datasheet.octopart.com/PTS647SK38SMTR2LFS-C%26K-Components-datasheet-117317067.pdf?src-supplier=Electro+Sonic, ComponentLink11URL=http://datasheet.octopart.com/PTS647SK38SMTR2LFS-C%26K-Components-datasheet-117317067.pdf?src-supplier=Electro+Sonic, ComponentLink12Description=http://datasheet.octopart.com/PTS647SK38SMTR2LFS-C%26K-Components-datasheet-117317067.pdf?src-supplier=TTI, ComponentLink12URL=http://datasheet.octopart.com/PTS647SK38SMTR2LFS-C%26K-Components-datasheet-117317067.pdf?src-supplier=TTI, ComponentLink13Description=http://datasheet.octopart.com/PTS647SK38SMTR2LFS-C%26K-Components-datasheet-117317067.pdf?src-supplier=Rutronik, ComponentLink13URL=http://datasheet.octopart.com/PTS647SK38SMTR2LFS-C%26K-Components-datasheet-117317067.pdf?src-supplier=Rutronik, ComponentLink14Description=http://datasheet.octopart.com/PTS647SK38SMTR2LFS-C%26K-Components-datasheet-117317067.pdf?src-supplier=LCSC, ComponentLink14URL=http://datasheet.octopart.com/PTS647SK38SMTR2LFS-C%26K-Components-datasheet-117317067.pdf?src-supplier=LCSC, ComponentLink15Description=http://datasheet.octopart.com/PTS647SK38SMTR2LFS-C%26K-Components-datasheet-117317067.pdf?src-supplier=Sager+Electronics, ComponentLink15URL=http://datasheet.octopart.com/PTS647SK38SMTR2LFS-C%26K-Components-datasheet-117317067.pdf?src-supplier=Sager+Electronics, Manufacturer Part Number=PTS647SK38SMTR2LFS, Pricing="1=0,26, 10=0,226, 25=0,2116, 100=0,1897, 250=0,17588, 500=0,16596, 1000=0,15666 (USD)", RoHS=No, RoHS Compliant=Yes, Stock=4966, Supplier=Digikey
U1: "SMD Module, ESP32-S3R8 With 8 mb", LCSC Part Number=C2980300, Manufacturer="Espressif Systems", Supplier Part Number=1965-ESP32-S3-WROOM-1U-N8R8CT-ND, Category=Uncategorized, ComponentLink1Description=https://datasheet.octopart.com/ESP32-S3-WROOM-1U-N8R8-Espressif-Systems-datasheet-165560563.pdf?src-supplier=TME, ComponentLink1URL=https://datasheet.octopart.com/ESP32-S3-WROOM-1U-N8R8-Espressif-Systems-datasheet-165560563.pdf?src-supplier=TME, Manufacturer Part Number=ESP32-S3-WROOM-1U-N8R8, Pricing="1=6,13, 10=5,313, 25=5,0276, 100=4,635, 250=4,39984 (USD)", RoHS=No, Stock=7165, Supplier=Digikey
U2: "IC REG LIN 3.3V 1.5A SOT-223-4", Case/Package=SOP, Dropout Voltage1-Max=550mV, Dropout Voltage1-Nom=340mV, Input Voltage Absolute-Max=20V, LCSC Part Number=C181262, Manufacturer="Texas Instruments", Min Input Voltage=3.8V, Operating Temperature, TJ-Max=125°C, Operating Temperature, TJ-Min=-40°C, Output Current1-Max=1.5A, Output Voltage1-Max=3.4V, Output Voltage1-Min=3.2V, Output Voltage1-Nom=3.3V, Package Body Material=Plastic, Package Shape=Rectangular, Peak Reflow Temperature (Cel)=260°C, Supplier Part Number=296-24897-1-ND, Voltage Tolerance-Max=3%, Adjustability=FIXED, Category="Voltage Regulators - Linear", Channels=1, ComponentLink1Description=https://www.ti.com:443/lit/ds/symlink/tl1963a.pdf?src-supplier=IHS+Markit, ComponentLink1URL=https://www.ti.com:443/lit/ds/symlink/tl1963a.pdf?src-supplier=IHS+Markit, ComponentLink2Description=https://datasheet.ciiva.com/2046/-2046068.pdf?src-supplier=Digikey, ComponentLink2URL=https://datasheet.ciiva.com/2046/-2046068.pdf?src-supplier=Digikey, Height - Seated (Max)=1.8mm, JESD-30 Code=R-PDSO-G4, JESD-609 Code=e3, Length=6.5mm, Manufacturer Part Number=TL1963A-33DCYR, Max Supply Voltage=20V, Moisture Sensitivity Level=2, Number of Outputs=1, Packaging="Tape and Reel", Pins=4, Pricing="1=2,76, 10=2,062, 25=1,8864, 100=1,6934, 250=1,60148, 500=1,54604, 1000=1,50041 (USD)", Qualification Status="Not Qualified", Reach SVHC Compliant=Yes, Regulator Type="FIXED POSITIVE SINGLE OUTPUT LDO REGULATOR", RoHS=Yes, RoHS Compliant=Yes, Stock=1756, Supplier=Digikey, Surface Mount=Yes, Technology=BIPOLAR, Terminal Finish=Tin, Terminal Form="Gull Wing", Terminal Pitch=2.3mm, Terminal Position=DUAL, Width=3.5mm
U3: library part AD8515ARTZ-REEL7, "IC OPAMP GP 1 CIRCUIT SOT23-5", Average Bias Current-Max (IIB)=8nA, Bias Current-Max (IIB) @25C=30pA, Case/Package=LSSOP, Frequency Compensation=YES, Input Offset Voltage-Max=8mV, LCSC Part Number=C89478, Manufacturer="Analog Devices", Max Operating Temperature=125°C, Max Supply Current=600uA, Micropower=Yes, Min Operating Temperature=-40°C, Nominal Supply Voltage=3V, Package Body Material=Plastic, Package Equivalence Code=TSOP5/6,.11,37, Package Shape=Rectangular, Package Style="SMALL OUTLINE, LOW PROFILE, SHRINK PITCHMeter", Peak Reflow Temperature (Cel)=260°C, Power=No, Power Supplies=1.8/5V, Supplier Part Number=505-AD8515ARTZ-REEL7CT-ND, Supply Voltage Limit-Max=6V, Temperature Grade=AUTOMOTIVE, Time @ Peak Reflow Temperature-Max (s)=40s, Voltage Gain-Min=110000, Amplifier Type="OPERATIONAL AMPLIFIER", Architecture=VOLTAGE-FEEDBACK, Category="Amplifiers - Op Amps, Buffer, Instrumentation", Channels=1, Common-mode Reject Ratio-Nom=54dB, ComponentLink1Description=https://datasheet.ciiva.com:443/pdfs/VipMasterIC/IC/ANDI/ANDI-S-A0002885272/ANDI-S-A0002885272-1.pdf?src-supplier=IHS+Markit, ComponentLink1URL=https://datasheet.ciiva.com:443/pdfs/VipMasterIC/IC/ANDI/ANDI-S-A0002885272/ANDI-S-A0002885272-1.pdf?src-supplier=IHS+Markit, ComponentLink2Description=https://datasheet.ciiva.com/1793/ad8515-1793280.pdf?src-supplier=Digikey, ComponentLink2URL=https://datasheet.ciiva.com/1793/ad8515-1793280.pdf?src-supplier=Digikey, ComponentLink3Description=https://datasheet.ciiva.com/1793/ad8515-1793281.pdf?src-supplier=Digikey, ComponentLink3URL=https://datasheet.ciiva.com/1793/ad8515-1793281.pdf?src-supplier=Digikey, ComponentLink4Description=https://datasheet.ciiva.com/1793/ad8515-1793282.pdf?src-supplier=Digikey, ComponentLink4URL=https://datasheet.ciiva.com/1793/ad8515-1793282.pdf?src-supplier=Digikey, ComponentLink5Description=https://datasheet.ciiva.com/10326/ad8515-10326750.pdf?src-supplier=Avnet, ComponentLink5URL=https://datasheet.ciiva.com/10326/ad8515-10326750.pdf?src-supplier=Avnet, ComponentLink6Description=https://datasheet.ciiva.com/46385/189715-46385032.pdf?src-supplier=Element14, ComponentLink6URL=https://datasheet.ciiva.com/46385/189715-46385032.pdf?src-supplier=Element14, Height - Seated (Max)=1.45mm, JESD-30 Code=R-PDSO-G5, JESD-609 Code=e3, Length=2.9mm, Low-Bias=Yes, Low-Offset=No, Manufacturer Part Number=AD8515ARTZ-REEL7, Moisture Sensitivity Level=1, Packaging="Tape and Reel", Pins=5, Pricing="1=1,92, 10=1,194, 25=1,004, 100=0,7882, 250=0,68224, 500=0,61708, 1000=0,56248 (USD)", Programmable Power=No, Qualification Status="Not Qualified", Reach SVHC Compliant=Yes, RoHS=Yes, RoHS Compliant=Yes, Slew Rate=2.7V/µs, Stock=8412, Supplier=Digikey, Surface Mount=Yes, Technology=CMOS, Terminal Finish=Tin, Terminal Form="Gull Wing", Terminal Pitch=0.95mm, Terminal Position=DUAL, Unity Gain BW-Nom=5MHz, Wideband=No, Width=1.6mm
U4: "IC BUFF NON-INVERT 5.5V SOT-23-5", Case/Package=LSSOP, LCSC Part Number=C473338, Load Capacitance (CL)=30pF, Manufacturer="Texas Instruments", Max Operating Temperature=125°C, Max Supply Voltage=5.5V, Min Operating Temperature=-40°C, Min Supply Voltage=1.6V, Nominal Supply Voltage=1.8V, Package Body Material=Plastic, Package Equivalence Code=TSOP5/6,.11,37, Package Shape=Rectangular, Package Style="SMALL OUTLINE, LOW PROFILE, SHRINK PITCHMeter", Power Supplies=3.3V, Supplier Part Number=296-37172-1-ND, Temperature Grade=AUTOMOTIVE, Category="Integrated Circuits (ICs)", Channels=1, ComponentLink1Description=https://www.ti.com:443/lit/ds/symlink/sn74lv1t125.pdf?src-supplier=IHS+Markit, ComponentLink1URL=https://www.ti.com:443/lit/ds/symlink/sn74lv1t125.pdf?src-supplier=IHS+Markit, ComponentLink2Description=https://datasheet.ciiva.com/29888/sn74lv1t125-29888035.pdf?src-supplier=Avnet, ComponentLink2URL=https://datasheet.ciiva.com/29888/sn74lv1t125-29888035.pdf?src-supplier=Avnet, ComponentLink3Description=https://datasheet.ciiva.com/29634/sn74lv1t125-29634743.pdf?src-supplier=Digikey, ComponentLink3URL=https://datasheet.ciiva.com/29634/sn74lv1t125-29634743.pdf?src-supplier=Digikey, ComponentLink4Description=https://datasheet.ciiva.com/29634/sn74lv1t125-29634744.pdf?src-supplier=Digikey, ComponentLink4URL=https://datasheet.ciiva.com/29634/sn74lv1t125-29634744.pdf?src-supplier=Digikey, ComponentLink5Description=https://datasheet.ciiva.com/29634/sn74lv1t125-29634745.pdf?src-supplier=Digikey, ComponentLink5URL=https://datasheet.ciiva.com/29634/sn74lv1t125-29634745.pdf?src-supplier=Digikey, ComponentLink6Description=https://datasheet.ciiva.com/30038/sn74lv1t125-30038267.pdf?src-supplier=Avnet, ComponentLink6URL=https://datasheet.ciiva.com/30038/sn74lv1t125-30038267.pdf?src-supplier=Avnet, Control Type="ENABLE LOW", Height - Seated (Max)=1.45mm, JESD-30 Code=R-PDSO-G5, JESD-609 Code=e4, Length=2.9mm, Logic Type="BUS DRIVER", Manufacturer Part Number=SN74LV1T125DBVR, Max I(ol)=5.5mA, Moisture Sensitivity Level=1, Number of Bits=1, Number of Ports=2, Output Characteristics=3-STATE, Output Polarity=True, Packaging="Tape and Reel", Pins=5, Pricing="1=0,38, 10=0,265, 25=0,2364, 100=0,2042, 250=0,18884, 500=0,17962, 1000=0,17201 (USD)", Prop. Delay@Nom-Sup=9ns, Propagation Delay (tpd)=14.5ns, Qualification Status="Not Qualified", Reach SVHC Compliant=Yes, RoHS=Yes, RoHS Compliant=Yes, Stock=62099, Supplier=Digikey, Surface Mount=Yes, Technology=CMOS, Terminal Finish=Nickel, Terminal Form="Gull Wing", Terminal Pitch=0.95mm, Terminal Position=DUAL, Width=1.6mm

## Via types
v1: diameter 16, hole 12, Top Layer to Bottom Layer, tented both sides, 760 vias
v2: diameter 27.56, hole 12, Top Layer to Bottom Layer, tented both sides, 59 vias

## Nets (pads, with @x,y where several pads share a name; then routed paths per layer and width w, separated by ;. In a path a pad name is that pad's centre, name@x,y a point inside that pad or via, vN(x,y) a via of type N, cw(c..) or ccw(c..) an arc to the next point about the centre after c; other vN are vias at no path point)
+3V3: C1.2 C2.2 C14.2 J2.2 R4.2 R5.2 R6.2 R7.2 R8.2 R9.2 U1.2 U3.5 | length 6106.3
  Top Layer w20: R5.2 220.29,169.37 220.29,152.66 237.13,135.83 410.5,135.83 444.67,170 R6.2 619.31,169.37 619.31,152.66 636.14,135.83 810.01,135.83 844.18,170 R7.2 1019.31,169.37 1019.31,152.66 1036.14,135.83 1170.83,135.83 1205,170 R8.2 1420.29,169.37 1420.29,152.66 1437.13,135.83 1610.99,135.83 1645.17,170 ; R4.2 1040,2670 1080,2630 C1.2 ; 970.25,1993.78 970.25,2005 ; C2.2@1113.82,2568.82 C2.2 ; 1645.17,1674.84 1645.17,170 ; R9.2 1645.17,170 ; C14.2 1830.3,1594.7 1907.3,1594.7 U3.5
  Top Layer w25: 1088.82,2568.82 C2.2@1113.82,2568.82
  Top Layer w26: C2.2 C1.2
  Top Layer w30: J2.2 530.49,1925 610.49,2005 970.25,2005 970.25,2145.25 1050,2225 1050,2530 1088.82,2568.82 ; 970.25,1993.78 1234.03,1730 1590,1730 1645.17,1674.84 1694.84,1674.84 1750,1730 1845,1730 1907.6,1667.4 U3.5 ; C1.2@1121.18,2618.82 U1.2
+3V3_REG: C5.2 J2.1 R3.2 U2.3 | length 392.5
  Top Layer w20: R3.2 190.63,1885.63 190.63,1925.63
  Top Layer w25: C5.2 242.74,2038.68 U2.3
  Top Layer w30: 190.63,1925.63 223.03,1958.03 246.97,1958.03 ; U2.3 246.97,1958.03 ; J2.1 280,1925 246.97,1958.03
+5V: C3.2 C4.2 C15.2 C16.2 C17.2 C18.2 C19.2 C20.2 C21.2 C22.2 C23.2 C24.2 C25.2 C26.2 C28.2 D1.2 D5.1 D6.1 D7.1 D8.1 D9.1 D10.1 D11.1 D12.1 D13.1 D14.1 D15.1 D16.1 J1.A4B9 J1.B4A9 U2.1 U4.5 | length 7367.8